# Altium PCB PCB1.PcbDoc
Units mil, origin at the board's own origin, x right, y up, seen from the top; angles counter-clockwise.
Board outline 1574.8 x 1181.1 mil, 2 copper layers (Top Layer, Bottom Layer); 38 components, 38 nets, 230 pads, 41 vias.
Unrouted connection lines stored in the file: 44.
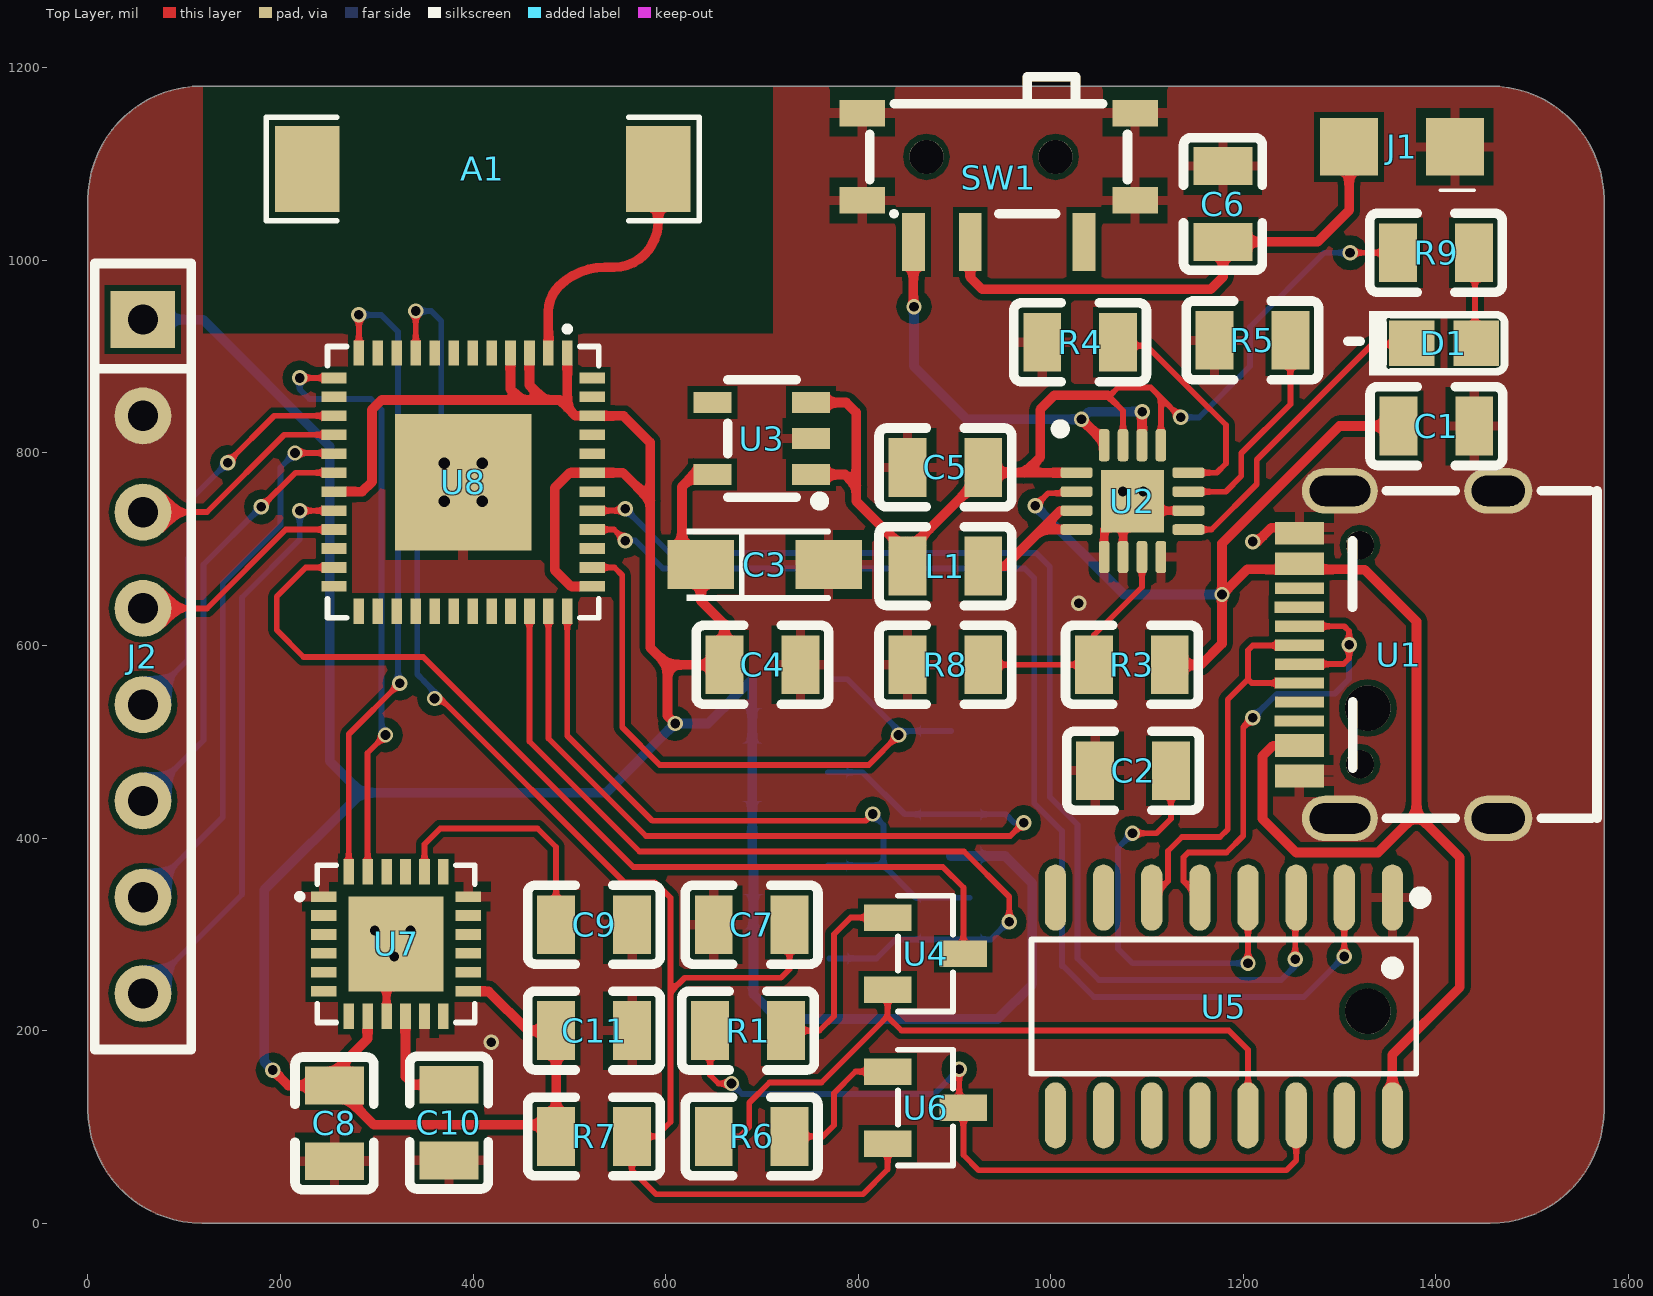
[diagram p0: Top Layer view]
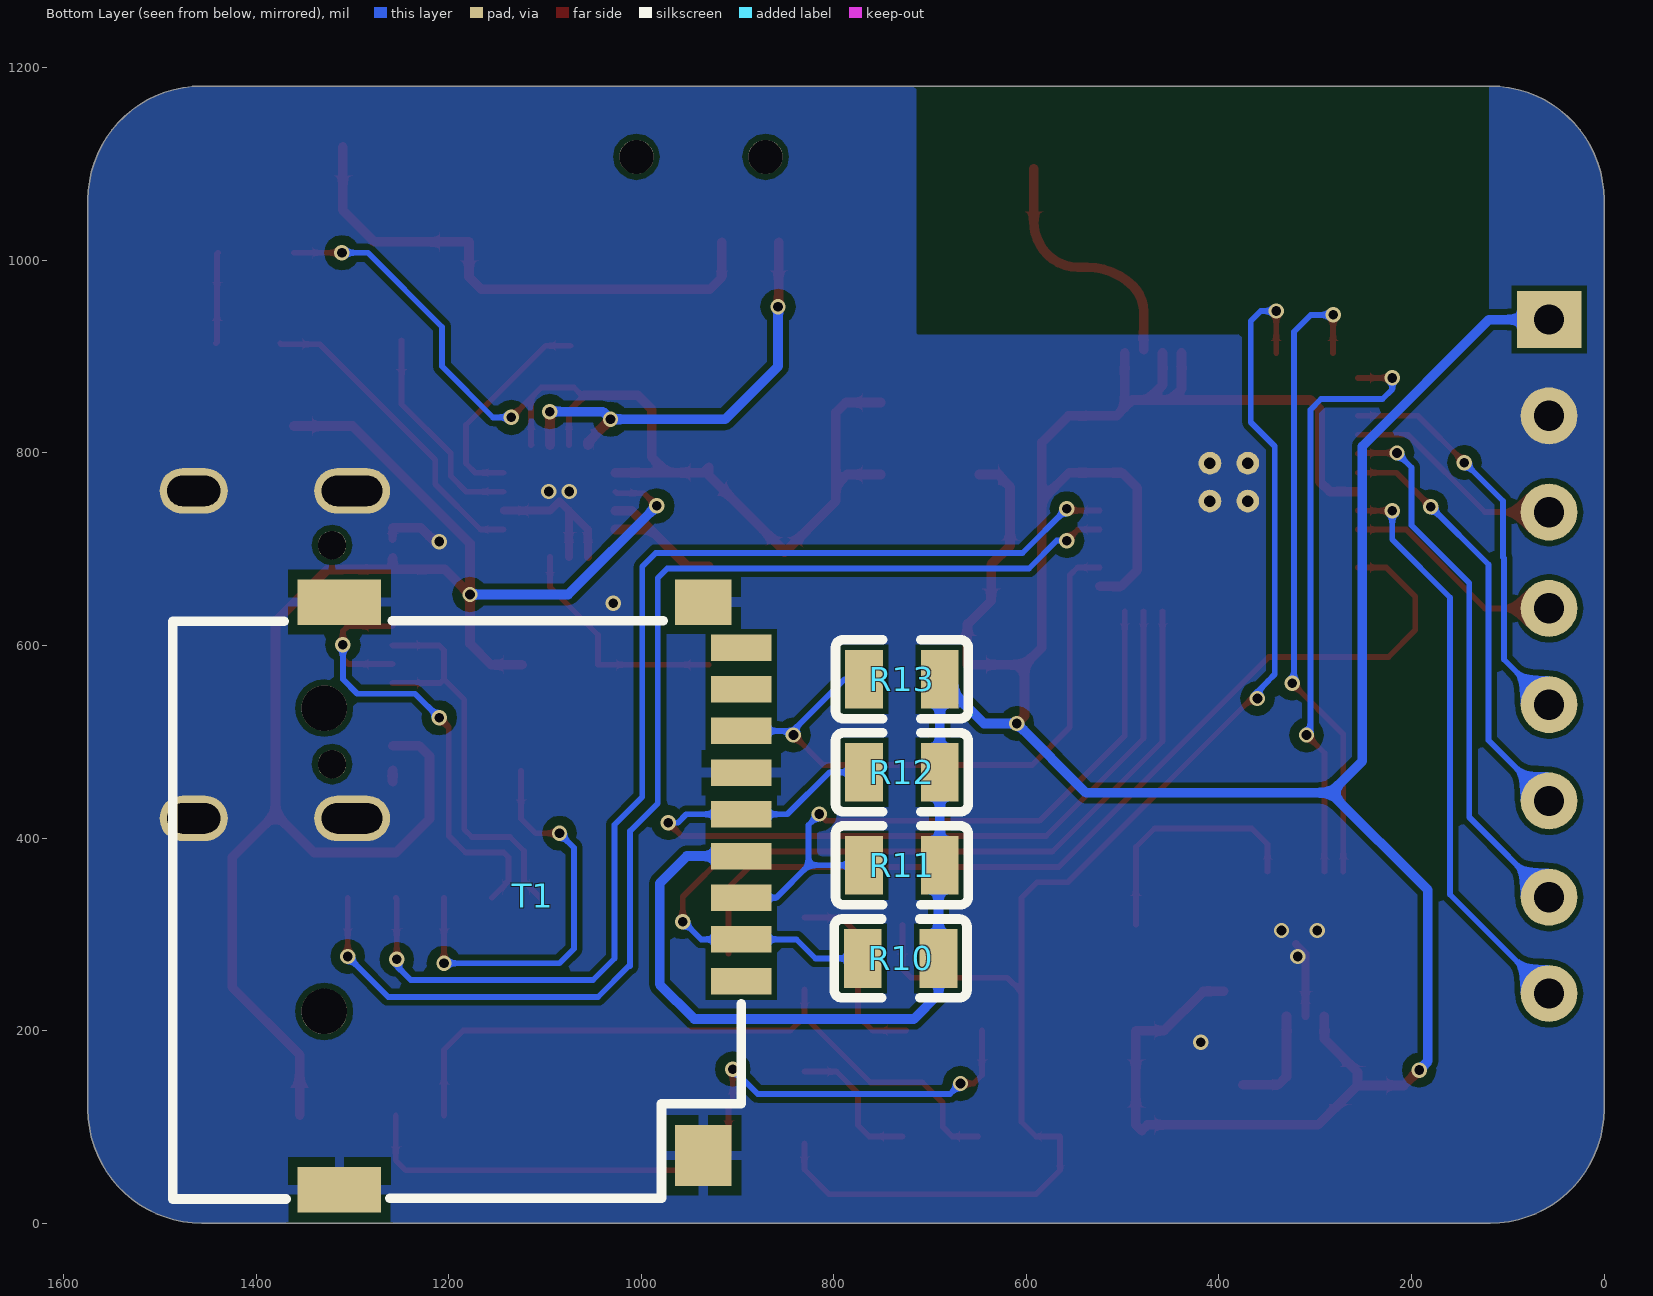
[diagram p1: Bottom Layer view, seen from below]
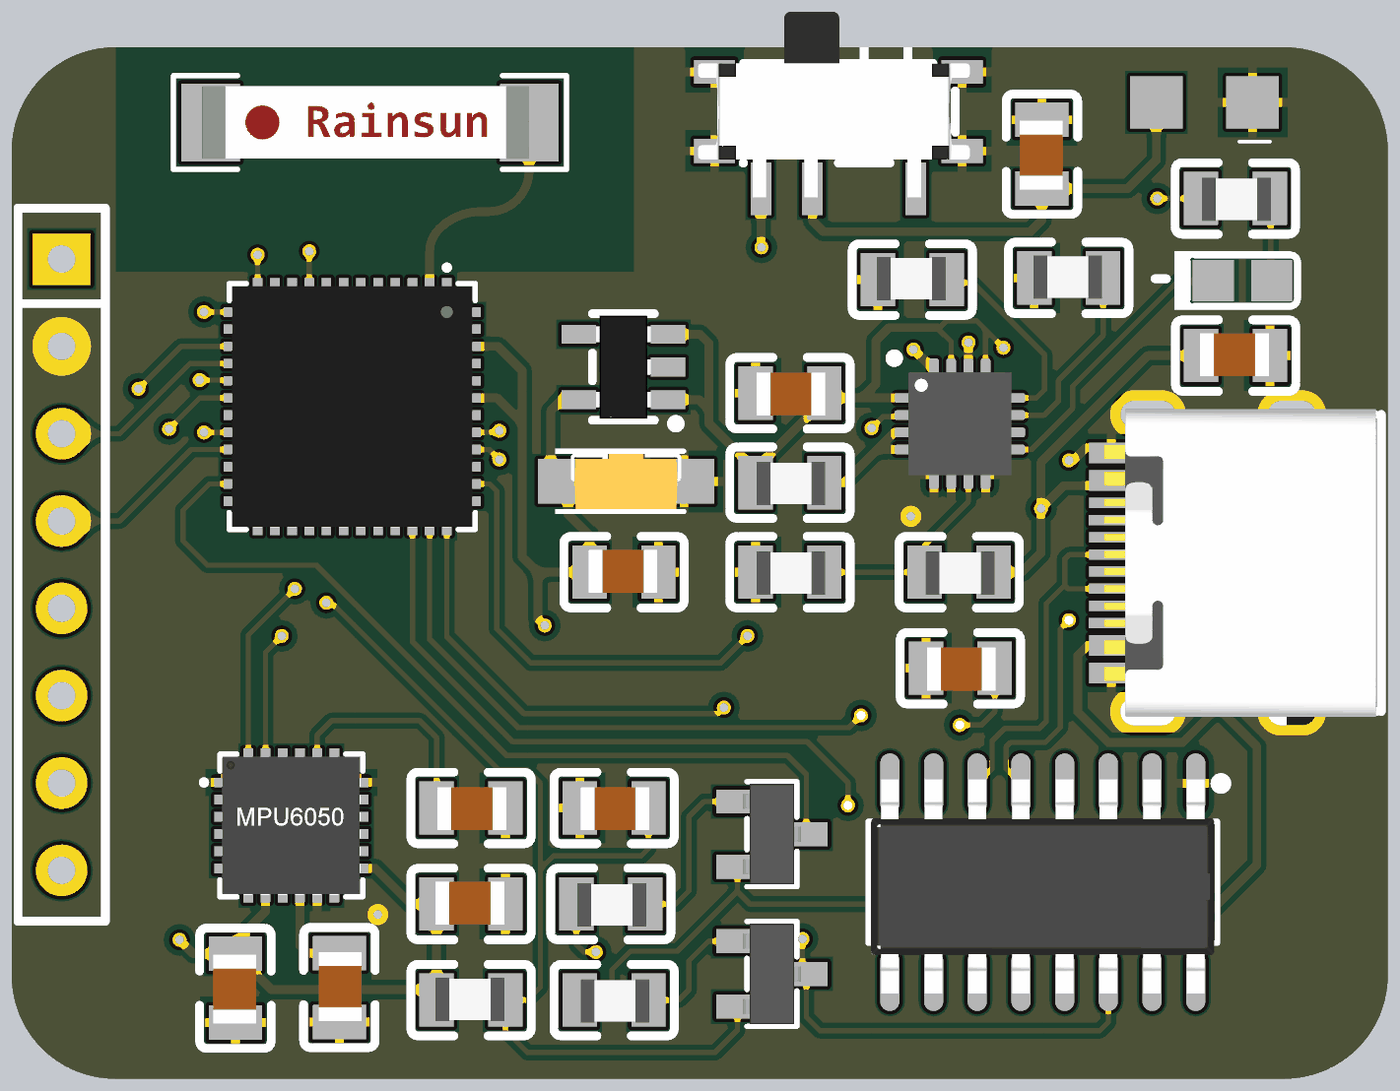
[diagram p2: 3D render of the assembled board from above, using the file's embedded part models]
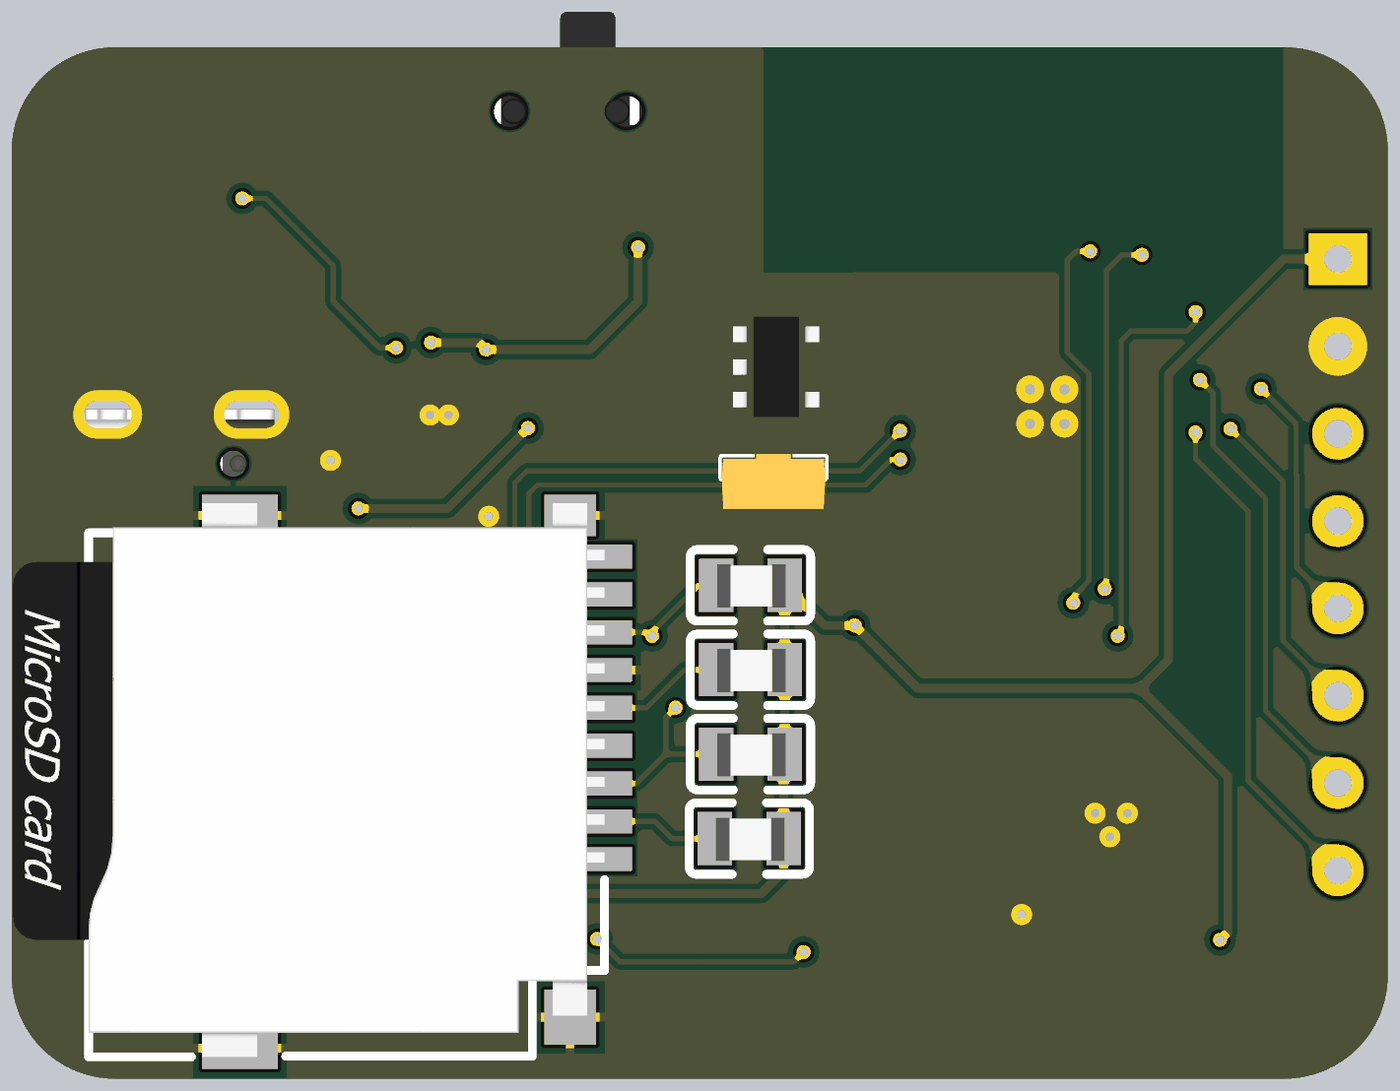
[diagram p3: 3D render of the assembled board from below, using the file's embedded part models]

## Layer stack, top to bottom
Top Solder: solder mask 0.4, Solder Resist, Dk 3.5
Top Layer: signal copper 1.4
Dielectric 1: dielectric 12.6, FR-4, Dk 4.8
Bottom Layer: signal copper 1.4
Bottom Solder: solder mask 0.4, Solder Resist, Dk 3.5

## Board outline
0,118.11 0,1062.99 cw(c118.11,1062.99) 118.11,1181.1 1456.69,1181.1 cw(c1456.69,1062.99) 1574.8,1062.99 1574.8,118.11 cw(c1456.69,118.11) 1456.69,0 118.11,0 cw(c118.11,118.11)

## Design rules (kind name [scope] priority, off if disabled: settings)
Clearance [All] p1: gap=6 ignorepadtopadclearanceinfootprint=FALSE except(10: Arc-Arc Arc-Track Track-Track Via-Fill Via-Poly Via-Region)
ComponentClearance [All] p1 off: gap=10 collisioncheckmode=3 verticalgap=10 showdistances=FALSE
DiffPairsRouting [All] p1: maxlimit=10 minlimit=10 mostfreqgap=10 toplayer_minwidth=6 toplayer_maxwidth=15 toplayer_prefwidth=10 bottomlayer_minwidth=6 bottomlayer_maxwidth=15 bottomlayer_prefwidth=10 maxuncoupledlength=500
HoleToHoleClearance [All] p1: gap=2 allowstackedmicrovias=TRUE
MinimumSolderMaskSliver [Not InComponent('U8','U7','A1','T1','U1','U2')] p1: minsoldermaskwidth=2
PolygonConnect [All] p1: thpad.connectstyle=Direct thpad.reliefconductorwidth=10 thpad.reliefentries=4 thpad.polygonreliefangle="90 Angle" thpad.airgapwidth=10 smdpad.connectstyle=Relief smdpad.reliefconductorwidth=10 smdpad.reliefentries=4 smdpad.polygonreliefangle="90 Angle" smdpad.airgapwidth=10 via.connectstyle=Direct via.reliefconductorwidth=10 via.reliefentries=4 via.polygonreliefangle="90 Angle" via.airgapwidth=10
RoutingVias [All] p1: holewidth=8 width=16 viastyle="Through Hole" minholewidth=6 minwidth=12 maxholewidth=28 maxwidth=50
SolderMaskExpansion [All] p1: expansion=4 istentingtop=FALSE
Width [All] p1: maxlimit=20 minlimit=6 preferedwidth=10
26 further rules are at their usual default settings.

## Classes and differential pairs
differential pair USB: +USB_P -USB_N

## Components (designator, comment, footprint, x,y, rotation, side; value= is the part's Value field where it differs from the comment)
A1 "AN9520-245" AN9520-245 410,1095 r0 top
C1 "10uf" C0805 1464.53,793.94 r180 top
C2 "1uf" C0805 1021.73,504.06 r0 top
C3 "10uf" C+ 703,684 r180 top
C4 "0.1uf" C0805 764.53,545.94 r180 top
C5 "22uf" C0805 826.73,819.06 r0 top
C6 "1uf" C0805 1213.05,1122.53 r270 top
C7 "1uf" C0805 625.47,344.06 r0 top
C8 "10nf" C0805 290.06,167.53 r270 top
C9 "2.2nf" C0805 461.73,344.06 r0 top
C10 "0.1uf" C0805 340.94,40.47 r90 top
C11 "0.1uf" C0805 589.53,165.94 r180 top
D1 "LED 蓝 0805" "LED 蓝  0805" 1335.47,884 r0 top
J1 "2.54_2P" 2P 1365,1118 r0 top
J2 "8P" 8P-P2.54 57.09,588.58 r270 top locked
L1 "2.2uh" R0805 826.73,716.56 r0 top
R1 "10k" R0805 621.73,234.06 r0 top
R3 "10k" R0805 1020.47,614.06 r0 top
R4 "2K" R0805 1094.53,880.94 r180 top
R5 "500" R0805 1273.53,882.94 r180 top
R6 "10k" R0805 625.47,124.06 r0 top
R7 "10k" R0805 589.53,55.94 r180 top
R8 "10k" R0805 826.73,614.06 r0 top
R9 "2.2K" R0805 1336.47,1042.06 r0 top
R10 "10k" R0805 794.53,309.06 r180 bottom locked
R11 "10k" R0805 793.27,405.72 r180 bottom locked
R12 "10k" R0805 793.27,502.39 r180 bottom locked
R13 "10k" R0805 793.27,599.05 r180 bottom locked
SW1 "SW-TH_MSK12C02" SW-TH_MSK12C02 946,1086 r180 top
T1 "TF PUSH" TF-SMD_TF-PUSH 1105,340 r270 bottom locked
U1 "TYPE-C" USB-C 1361.68,590.55 r90 top locked
U2 "ETA6003" ETA6003 1010,825 r0 top
U3 "ME6212C33M5G_JX" ME6212C33M5G_JX 700,815 r0 top
U4 "S8050_C908252" s8050 870,280 r180 top
U5 "CH340C" CH340C 1180,225 r180 top
U6 "S8050_C908252" s8050 870,120 r180 top
U7 "MPU6050" MPU6050 320,290 r270 top
U8 "ESP32-PICO-D4" ESP32-PICO-D4 389.69,769.68 r180 top locked

## Footprints (in the part's own frame and the unit in brackets; to place one, negate y for a bottom-side part, rotate by r counter-clockwise, add the part's x,y. Pads: shape width x height; smd on the part's side, far side on the other; paste and mask are expansions set on the pad)
2P [mil]
  rect 60x60 smd: 1(-55,0) 2(55,0)
  silkscreen extent 40,-45 75,-45
8P-P2.54 [mm] "J8"
  rect 1.5x1.7 hole 0.8: 1(-8.89,0)
  round 1.5 hole 0.8: 2(-6.35,0) 3(-3.81,0) 4(-1.27,0) 5(1.27,0) 6(3.81,0) 7(6.35,0) 8(8.89,0)
  silkscreen extent -10.37,-1.27 10.37,1.27
AN9520-245 [mm] "A?"
  rect 1.71x2.268 smd: 1(-4.63,0) 2(4.63,0)
  silkscreen extent -5.71,-1.36 5.71,1.36, body extent -4.88,-1.05 4.62,1.05, height 1.05
C0805 [mm] "C?"
  rect 1x1.55 smd: 1(0.623,-0.865) 2(2.623,-0.865)
  silkscreen extent -0.13,-1.91 3.37,0.18, body extent 0.65,-1.51 2.65,-0.26, height 0.6
C+ [mil] "C?"
  rect 69.19x51.02 smd: 1(66.39,0) 2(-66.39,0)
  silkscreen extent -66,-37 81,37, body extent -63,-31 63,32, height 31
CH340C [mm] "U?"
  oval 0.56x1.745 smd: 1(-4.445,-2.873) 2(-3.175,-2.873) 3(-1.905,-2.873) 4(-0.635,-2.873) 5(0.635,-2.873) 6(1.905,-2.873) 7(3.175,-2.873) 8(4.445,-2.873) 9(4.445,2.873) 10(3.175,2.873) 11(1.905,2.873) 12(0.635,2.873) 13(-0.635,2.873) 14(-1.905,2.873) 15(-3.175,2.873) 16(-4.445,2.873)
  silkscreen extent -5.33,-3.02 5.08,1.77, body extent -4.99,-2.99 4.99,3.24, height 1.58
ESP32-PICO-D4 [mm] "U?"
  rect 0.28x0.665 smd: 1(-2.75,-3.408) 2(-2.25,-3.408) 3(-1.75,-3.408) 4(-1.25,-3.408) 5(-0.75,-3.408) 6(-0.25,-3.408) 7(0.25,-3.408) 8(0.75,-3.408) 9(1.25,-3.408) 10(1.75,-3.408) 11(2.25,-3.408) 12(2.75,-3.408) 25(2.75,3.408) 26(2.25,3.408) 27(1.75,3.408) 28(1.25,3.408) 29(0.75,3.408) 30(0.25,3.408) 31(-0.25,3.408) 32(-0.75,3.408) 33(-1.25,3.408) 34(-1.75,3.408) 35(-2.25,3.408) 36(-2.75,3.408)
  rect 0.665x0.28 smd: 13(3.408,-2.75) 14(3.408,-2.25) 15(3.408,-1.75) 16(3.408,-1.25) 17(3.408,-0.75) 18(3.408,-0.25) 19(3.408,0.25) 20(3.408,0.75) 21(3.408,1.25) 22(3.408,1.75) 23(3.408,2.25) 24(3.408,2.75) 37(-3.408,2.75) 38(-3.408,2.25) 39(-3.408,1.75) 40(-3.408,1.25) 41(-3.408,0.75) 42(-3.408,0.25) 43(-3.408,-0.25) 44(-3.408,-0.75) 45(-3.408,-1.25) 46(-3.408,-1.75) 47(-3.408,-2.25) 48(-3.408,-2.75)
  round 0.6 hole 0.3: 49(-0.5,0.5) 49(-0.5,-0.5) 49(0.5,0.5) 49(0.5,-0.5)
  rect 3.6x3.6 smd: 49(0,0)
  silkscreen extent -3.58,-4.11 3.58,3.58, body extent -3.51,-3.51 3.51,3.51, height 0.78
ETA6003 [mm]
  rrect50% 0.85x0.28 smd: 1(0.43,-1.155) 2(0.43,-1.655) 3(0.43,-2.155) 4(0.43,-2.655) 9(3.38,-2.655) 10(3.38,-2.155) 11(3.38,-1.655) 12(3.38,-1.155)
  rrect50% 0.28x0.85 smd: 5(1.155,-3.38) 6(1.655,-3.38) 7(2.155,-3.38) 8(2.655,-3.38) 13(2.655,-0.43) 14(2.155,-0.43) 15(1.655,-0.43) 16(1.155,-0.43)
  rect 1.65x1.65 smd: 17(1.905,-1.905)
  silkscreen extent -0.13,-0.13 0.13,0.13, body extent 0.41,-3.4 3.41,-0.4, height 0.98
"LED 蓝  0805" [mm]
  rect 1.2x1.2 smd paste+0 mask+0: 1(2.704,0.762) 2(1.004,0.762)
  silkscreen extent -0.69,-0.09 3.46,1.61, body extent 0.93,0.23 2.94,1.3, height 0.46
ME6212C33M5G_JX [mm] "U?"
  rect 1x0.55 smd: 1(1.3,-0.95) 2(1.3,0) 3(1.3,0.95) 4(-1.3,0.95) 5(-1.3,-0.95)
  silkscreen extent -0.9,-1.78 1.65,1.55, body extent -1.25,-1.5 1.25,1.5, height 0.55
MPU6050 [mm] "U?"
  rect 0.28x0.665 smd: 1(-1.25,-1.907) 2(-0.75,-1.907) 3(-0.25,-1.907) 4(0.25,-1.907) 5(0.75,-1.907) 6(1.25,-1.907) 13(1.25,1.907) 14(0.75,1.907) 15(0.25,1.907) 16(-0.25,1.907) 17(-0.75,1.907) 18(-1.25,1.907)
  rect 0.665x0.28 smd: 7(1.907,-1.25) 8(1.907,-0.75) 9(1.907,-0.25) 10(1.907,0.25) 11(1.907,0.75) 12(1.907,1.25) 19(-1.907,1.25) 20(-1.907,0.75) 21(-1.907,0.25) 22(-1.907,-0.25) 23(-1.907,-0.75) 24(-1.907,-1.25)
  rect 2.5x2.5 smd: 25(0,0)
  silkscreen extent -2.08,-2.61 2.08,2.08, body extent -2.02,-2.03 2.02,2.01, height 0.88
R0805 [mm] "R?"
  rect 1x1.55 smd: 1(0.623,-0.865) 2(2.623,-0.865)
  silkscreen extent -0.13,-1.91 3.37,0.18, body extent 0.65,-1.52 2.65,-0.26, height 0.43
s8050 [mm] "SOT-23-3_L2.9-W1.3-P1.90-LS2.4-BR"
  rect 1.25x0.7 smd: 1(1,-0.95) 2(1,0.95) 3(-1,0)
  silkscreen extent -0.73,-1.53 0.73,1.53, body extent -1.23,-1.46 1.25,1.46, height 0.65
SW-TH_MSK12C02 [mm]
  rect 0.6x1.524 smd: 1(-2.25,1.7) 2(0.75,1.7) 3(2.25,1.7)
  rect 1.2x0.7 smd: 4(-3.6,-1.7) 4(-3.6,0.6) 4(3.6,-1.7) 4(3.6,0.6)
  round 0.9 hole 0.9 unplated: ""(-1.5,-0.55) ""(1.905,-0.55)
  silkscreen extent -3.4,-2.67 3.4,0.95, body extent -3.82,-3.45 4.08,1.94, height 1.4
TF-SMD_TF-PUSH [mm] "T?"
  rect 0.7x1.6 smd: 1(2.25,5.3) 2(1.15,5.3) 3(0.05,5.3) 4(-1.05,5.3) 5(-2.15,5.3) 6(-3.25,5.3) 7(-4.35,5.3) 8(-5.45,5.3) CD(-6.55,5.3)
  rect 1.2x1.5 smd: 10(-7.75,4.3)
  rect 1.2x2.2 smd: 11(-7.75,-5.3) 12(7.75,-5.3)
  rect 1.6x1.5 smd: 13(6.85,4.3)
  round 1.2 hole 1.2 unplated: ""(-4.95,-5.7) ""(3.05,-5.7)
  silkscreen extent -7.26,-9.7 8,5.3, body extent -8.1,-11.9 8,5.3, height 2.2
USB-C [mm] "TYPE-C-31-M-12"
  oval 1.2x1.8 hole 0.8 slot 1.4 at 90 deg: 0(-4.32,-2.624) 0(4.32,-2.624)
  oval 1.2x2 hole 0.8 slot 1.6 at 90 deg: 0(-4.32,1.556) 0(4.32,1.556)
  rect 0.3x1.3 smd: A1(-3.35,2.623) A4(-2.55,2.623) A5(-1.25,2.623) A6(-0.25,2.623) A7(0.25,2.623) A8(1.25,2.624) A9(2.55,2.623) A12(3.35,2.623) B1(3.05,2.623) B4(2.25,2.623) B5(1.75,2.623) B6(0.75,2.623) B7(-0.75,2.623) B8(-1.75,2.624) B9(-2.25,2.623) B12(-3.05,2.623)
  round 0.75 hole 0.75 unplated: ""(-2.89,1.026) ""(2.89,1.026)
  silkscreen extent -4.32,-5.23 4.32,1.22, body extent -4.47,-5.08 4.47,2.82, height 3.25

## Part data
C1 C2 C4 C5 C6 C7 C8 C9 C10 C11: library part C0805
C3: library part C+
L1 R1 R3 R4 R5 R6 R7 R8 R9 R10 R11 R12 R13: library part R0805
U1: "TYPE-C-31-M-12"
U4 U6: library part s8050

## Via types
v1: diameter 16, hole 10, Top Layer to Bottom Layer, 41 vias

## Nets (pads, with @x,y where several pads share a name; then routed paths per layer and width w, separated by ;. In a path a pad name is that pad's centre, name@x,y a point inside that pad or via, vN(x,y) a via of type N, cw(c..) or ccw(c..) an arc to the next point about the centre after c; other vN are vias at no path point)
+3.3: C3.1 C4.2 C8.1 C11.2 J2.1 R7.2 R10.2 R11.2 R12.2 R13.2 T1.4 U3.5 U7.8 U7.13 U8.1 U8.3 U8.4 U8.19 U8.37 U8.43 U8.46 | length 4317.5
  Top Layer w10: v1(192,159) 208,143 C8.1 ; U8.19 284.84,759.84 295,770 295,845 305,855 450,855 ; U7.8 290.47,191.47 256,157 C8.1 ; U7.13 416.21,240.79 457,200 C11.2 486.26,102 480.26,96 474.26,102 297,102 C8.1 ; U8.4 438.9,866.1 450,855 ; U8.3 458.59,870.39 473.98,855 ; U8.1 497.96,847.04 ; U8.37 501.59,661.41 485,678 485,764 500.52,779.52 U8.43 555.48,779.52 584,751 ; v1(610,519) 602,527 602,580 ; U3.5 629.61,777.61 617,765 617,703.61 C3.1 636.61,646.39 660.26,622.74 661.26,622.74 C4.2 602,580 ; 450,855 473.98,855 ; 473.98,855 490,855 497.96,847.04 ; 497.96,847.04 506.42,838.58 U8.46 556.42,838.58 584,811 584,751 ; 584,751 584,598 602,580
  Bottom Layer w10: J2.1 119.42,938.58 251,807 251,480 284,447 ; v1(192,159) 183,168 183,346 284,447 ; T1.4 952.66,381.34 981,353 981,248 945,212 717,212 691.26,237.74 R10.2 691.26,370.41 R11.2 R12.2 R13.2 644,519 v1(610,519) 538,447 284,447
+5: C1.2 R3.2 U1.A4 U1.A9 U1.B4 U1.B9 U2.2 U5.16 | length 1789.2
  Top Layer w6: v1(984,745) 997.16,758.16 1025.24,758.16 U2.2
  Top Layer w10: R3.2 1156,580 1178,602 v1(1178,653) ; U1.A4@1258.41,496.07 1231.07,496.07 1220,485 1220,420 1255,385 1340,385 1380,425 ; U1.A9 U1.B4 ; U5.16 1355,175 1425,245 1425,380 1380,425 ; C1.2 1300,828 1178,706 v1(1178,653) ; v1(1178,653) 1204.13,679.13 U1.B4 ; U1.B4 1310.06,679.13 1310.63,678.57 1326.43,678.57 1380,625 1380,425
  Bottom Layer w10: v1(984,745) 1076,653 v1(1178,653)
BATT: SW1.3 U2.14 U2.16 | length 464.1
  Top Layer w10: SW1.3 857.42,952.58 v1(858,952) ; v1(1032,835) 1055.47,811.53 U2.16 ; U2.14 1094.84,842.84 v1(1095,843)
  Bottom Layer w10: v1(858,952) 858,890 913,835 v1(1032,835) 1040,843 v1(1095,843)
BATT1: C6.2 J1.1 SW1.2 | length 556.5
  Top Layer w10: SW1.2 916.47,982.47 928.94,970 1166,970 1179,983 C6.2 1277.26,1019.26 1310,1052 J1.1
DTR: R6.1 U4.2 U5.13 | length 731.8
  Top Layer w6: R6.1 677,90 687,100 687,125 708,146 762,146 830.63,214.63 ; U4.2 830.63,214.63 ; U5.13 1205,180 1185,200 845,200 830.63,214.37 830.63,214.63
EN: C7.2 R7.1 U6.2 U8.9 | length 1618.9
  Top Layer w6: U8.9 v1(340.48,947.48) ; v1@363,548 557,354 589,354 605,338 605,240 ; C7.2 728.74,263.74 720,255 620,255 605,240 ; U6.2 830.63,55.63 805,30 590,30 565,55 R7.1 590,90 605,105 605,240
  Bottom Layer w6: v1(340.48,947.48) 356.52,947.48 367,937 367,832 342,807 342,570.04 349,563.04 ; 349,563 v1@363.5,548.5
  other v1: 360,545
GND: C1.1 C2.1 C3.2 C4.1 C5.1 C6.1 C7.1 C8.2 C9.2 C10.1 C11.1 J1.2 J2.2 R4.2 R5.2 R8.1 SW1.4 T1.6 T1.10 T1.11 T1.12 T1.13 U1.0 U1.A1 U1.A12 U1.B1 U1.B12 U2.5 U2.6 U2.8 U2.10 U2.17 U3.2 U5.1 U7.1 U7.9 U7.11 U7.18 U7.25 U8.49 | length 337.9
  Top Layer w8: U7.9 310.16,280.16 U7.25 ; U2.5 1055.47,720.47 U2.17@1075.16,740.16 ; U2.6 U2.17@1075.16,740.16 ; U2.10 1094.84,740.16 U2.17 U2.17@1075.16,740.16 ; U1.B1 U1.A12
  Top Layer w10: v1(1210,708) 1215,708 1229.44,722.44 U1.A12 ; U1.A1 U1.B12
  other v1: 419,188 318,277 298,304 335,304 1029,644 1075,760 1096,760
IO0: U4.3 U8.23 | length 999.8
  Top Layer w6: U8.23 226.1,681.1 196,651 196,616 224,588 348.37,588 566.37,370 888,370 909.37,348.63 U4.3
MPU_SCL: U7.23 U8.13 | length 630.5
  Top Layer w6: v1(219.95,877.95) U8.13 ; U7.23 290.47,488.47 v1(309,507)
  Bottom Layer w6: v1(219.95,877.95) 219.95,866.05 230,856 294,856 305,845 305,511 v1(309,507)
MPU_SDA: U7.24 U8.12 | length 672
  Top Layer w6: U7.24 270.79,507.79 v1(324,561) ; U8.12 v1(281.42,943.42) v1@282,944
  Bottom Layer w6: v1(281.42,943.42) 304.58,943.42 322,926 322,566 324,564 v1(324,561)
NetA1_2: A1.2 U8.2 | length 259.1
  Top Layer w10: U8.2@478.27,907.37 478.27,946.82 cw(c515.58,946.82) 489.2,973.2 cw(c537,925.4) 537,993 546.62,993 ccw(c546.62,1037.38) 578,1006 ccw(c543.52,1040.48) 592.28,1040.48 A1.2
NetC2_2: C2.2 U5.4 | length 431.7
  Top Layer w6: v1(1085,405) 1110,405 1125,420 C2.2 ; v1(1205,270) U5.4
  Bottom Layer w6: v1(1085,405) 1070,390 1070,285 1085,270 v1(1205,270)
NetC9_1: C9.1 U7.20 | length 260.7
  Top Layer w6: U7.20 349.53,393.53 366,410 467,410 486.26,390.74 C9.1
NetC10_2: C10.2 U7.10 | length 111.4
  Top Layer w10: U7.10 329.84,152.16 338.26,143.74 C10.2
NetD1_1: D1.1 R9.2 | length 94.9
  Top Layer w6: R9.2 1440.74,1007 1440.74,915.19 D1.1
NetD1_2: D1.2 U2.9 | length 327.1
  Top Layer w6: U2.9 1167.02,720.47 1214,767.46 1214,793 1334,913 1374,913 D1.2
NetR1_2: R1.2 U4.1 | length 204.1
  Top Layer w6: R1.2 760,200 775,215 775,300 792.4,317.4 U4.1
NetR4_1: R4.1 U2.12 | length 225.5
  Top Layer w6: R4.1@1073.5,911.5 1099.5,911.5 1150,861 1182,829 1182,789 1172.53,779.53 U2.12
NetR5_1: R5.1 U2.11 | length 223.7
  Top Layer w6: U2.11 1181.84,759.84 1198,776 1198,799.63 1249,850.63 R5.1
NetR6_2: R6.2 U6.1 | length 149.3
  Top Layer w6: R6.2 763.23,90 775,101.77 775,135 797.4,157.4 U6.1
NTC: R3.1 R8.2 U2.7 | length 247.6
  Top Layer w6: R8.2 R3.1 1045,611 1094.84,660.84 U2.7
RTS: R1.1 U5.14 U6.3 | length 818.3
  Top Layer w6: R1.1 646.26,153.74 655,145 v1(668.5,145) ; v1(905,160) 905,124.37 U6.3 909.37,70.63 925,55 1245,55 1255,65 U5.14
  Bottom Layer w6: v1(668.5,145) 679.5,134 879,134 v1(905,160)
SW: L1.2 U2.3 U2.4 | length 157.2
  Top Layer w10: L1.2 952.56,682.5 990.53,720.47 ; U2.4 990.53,720.47 ; U2.3 1010.21,740.16 990.53,720.47
SYS: C5.2 L1.1 R9.1 U2.1 U2.13 U2.15 U3.1 U3.3 | length 1160.2
  Top Layer w6: U2.15 1075.16,843.84 1059,860 1062,860 1070,868 1104,868 1114.53,857.47 ; U2.13@1114,808.6 U2.13 1114.53,857.47 ; v1(1135,837) 1114.53,857.47 ; v1(1311,1008) R9.1
  Top Layer w10: U3.1 786.4,777.6 798,766 ; U3.3 787.6,852.4 798,842 798,766 ; U2.1 973,779.53 ; 1059,860 1004,860 989,845 989,795.53 973,779.53 ; 798,766 798,750 851.26,696.74 851.26,698.26 930,777 C5.2 935.47,779.53 973,779.53
  Bottom Layer w6: v1(1135,837) 1154,837 1207,890 1207,931 1284,1008 v1(1311,1008)
TF_CLK: R12.1 T1.5 U8.35 | length 898.6
  Top Layer w6: U8.35 478.27,503.35 579.63,402 958,402 v1(972,416)
  Bottom Layer w6: R12.1 804.67,468.33 848.36,424.64 T1.5 953.36,424.64 962,416 v1(972,416)
TF_CS: R10.1 T1.2 U8.34 | length 939
  Top Layer w6: U8.34 458.59,500.41 573,386 910,386 957,339 v1(957,313)
  Bottom Layer w6: R10.1 819,275 838.72,294.72 T1.2 937.72,294.72 960,317 957,314 v1(957,313)
TF_MISO: R13.1 T1.7 U8.38 | length 658.4
  Top Layer w6: U8.38 546.9,681.1 555,673 555,515 594,476 811,476 v1(842,507)
  Bottom Layer w6: R13.1 789,565 842.74,511.26 T1.7
TF_MOSI: R11.1 T1.3 U8.36 | length 705
  Top Layer w6: U8.36 497.96,506.3 586.25,418 808,418 v1(815,425)
  Bottom Layer w6: R11.1 826.33,371.67 ; v1(815,425) 826.33,413.67 826.33,371.67 ; T1.3@916.03,338.03 T1.3 859.97,338.03 826.33,371.67
TFT_BLK: J2.5 U8.15 | length 418.5
  Top Layer w6: v1(145,790) 193.58,838.58 U8.15
  Bottom Layer w6: J2.5 104,585.5 104,690.67 105,691.67 105,750 v1(145,790)
TFT_CS: J2.4 U8.21 | length 232.4
  Top Layer w6: J2.4 123.58,638.58 205.47,720.47 U8.21
TFT_DC: J2.6 U8.18 | length 446.6
  Top Layer w6: v1(180,744.05) 215.48,779.52 U8.18
  Bottom Layer w6: J2.6 120,501.5 120,684.05 v1(180,744.05)
TFT_RES: J2.3 U8.16 | length 231.7
  Top Layer w6: J2.3 123.58,738.58 203.89,818.89 U8.16
TFT_SCL: J2.7 U8.17 | length 567.7
  Top Layer w6: v1(215,800) 254.74,800 U8.17
  Bottom Layer w6: J2.7 140,421.5 140,652.63 140,665 200,725 200,785 v1(215,800)
TFT_SDA: J2.8 U8.20 | length 610.2
  Top Layer w6: v1(220,740) 255.38,740 U8.20
  Bottom Layer w6: J2.8 160,341.5 160,573.61 160,650 220,710 v1(220,740) v1@216,736
U0RXD: U5.3 U8.41 | length 1230.7
  Top Layer w6: U8.41 551.15,740.15 v1@555,744 ; v1(1254,274) 1254,337.09 U5.3
  Bottom Layer w6: v1(558,742) 604,696 985,696 999,682 999,442.63 1027.81,413.81 1027.81,274.81 1050.13,252.5 1239.5,252.5 1254,267 v1(1254,274)
U0TXD: U5.2 U8.40 | length 1279.9
  Top Layer w6: U8.40 546.53,720.47 v1(558,709) ; v1(1305,277) U5.2
  Bottom Layer w6: v1(558,709) 568.37,709 597.37,680 973,680 983,670 983,436 1011.81,407.19 1011.81,267 1013,267 1045,235 1263,235 v1(1305,277)
USB_N: U1.A7 U1.B7 U5.6 | length 432.2
  Top Layer w6: U5.6 1122,355.09 1122,386.63 1136.37,401 1176,401 1184,409 1184,544 1205,565 ; U1.B7 1208.98,561.02 1205,565 ; U1.A7 1258.01,600 1210,600 1205,595 1205,580 1205,565
USB_P: U1.A6 U1.B6 U5.5 | length 535.5
  Top Layer w6: U5.5 1138,355.09 1138,380 1143,385 1182.63,385 1200,402.37 1200,515 v1(1210,525) ; U1.A6 1304.29,580.71 1310,586.42 v1(1310,600.71) 1310,615 1304.92,620.08 U1.B6
  Bottom Layer w6: v1(1210,525) 1235,550 1295,550 1310,565 v1(1310,600.71)
pads on no net: A1.1 SW1. SW1.1 T1. T1.1 T1.8 T1.CD U1. U1.A5 U1.A8 U1.B5 U1.B8 U3.4 U5.7 U5.8 U5.9 U5.10 U5.11 U5.12 U5.15 U7.2 U7.3 U7.4 U7.5 U7.6 U7.7 U7.12 U7.14 U7.15 U7.16 U7.17 U7.19 U7.21 U7.22 U8.5 U8.6 U8.7 U8.8 U8.10 U8.11 U8.14 U8.22 U8.24 U8.25 U8.26 U8.27 U8.28 U8.29 U8.30 U8.31 U8.32 U8.33 U8.39 U8.42 U8.44 U8.45 U8.47 U8.48

## Polygon pours and split planes (outlines as drawn)
GND on Top Layer "Top Layer-No Net" (solid, remove dead copper, pour order 0): 0,118.11 0,1062.99 cw(c118.11,1062.99) 118.11,1181.1 1456.69,1181.1 cw(c1456.69,1062.99) 1574.8,1062.99 1574.8,118.11 cw(c1456.69,118.11) 1456.69,0 118.11,0 cw(c118.11,118.11)
GND on Bottom Layer "Top Layer-No Net1" (solid, remove dead copper, pour order 1): 0,118.11 0,1062.99 cw(c118.11,1062.99) 118.11,1181.1 1456.69,1181.1 cw(c1456.69,1062.99) 1574.8,1062.99 1574.8,118.11 cw(c1456.69,118.11) 1456.69,0 118.11,0 cw(c118.11,118.11)

## Other copper
Top Layer:
  pour cut-out: 711,1175 712,1174 712,1181
  pour cut-out: 134,924 119,924 119,939
  pour cut-out: 711,1175 712,1174 712,924 134,924 119,939 119,1183 710,1183 712,1181
Bottom Layer:
  pour cut-out: 153,1202 153,1181 178,1156
  pour cut-out: 119.99,1173.94 119.42,1173.37 119.42,949.8 336.8,949.8 346,959 124,1181 120,1181
  pour cut-out: 119.42,949.8 119.42,1180.42 120,1181 349.87,951.13 714.2,951.13 714.2,1177.8 120.2,1177.8 120,1178
  pour cut-out: 714.2,1177.8
  pour cut-out: 149,924 129.04,943.96 129.04,947.76 132.42,951.13 714.2,951.13 714.2,924.2 713,923

## Silkscreen, mask and mechanical layers (free items; w line width, h text height)
Mechanical 1:
  the board outline again, w3.94